# Altium PCB RobotCtrl_Power.PcbDoc
Units mil, origin at the board's own origin, x right, y up, seen from the top; angles counter-clockwise.
Board outline 3937.01 x 3937.01 mil, 4 copper layers (Top Layer, GND1, GND2, Bottom Layer), stack 23.756 mil thick; 51 components, 20 nets, 151 pads, 242 vias.
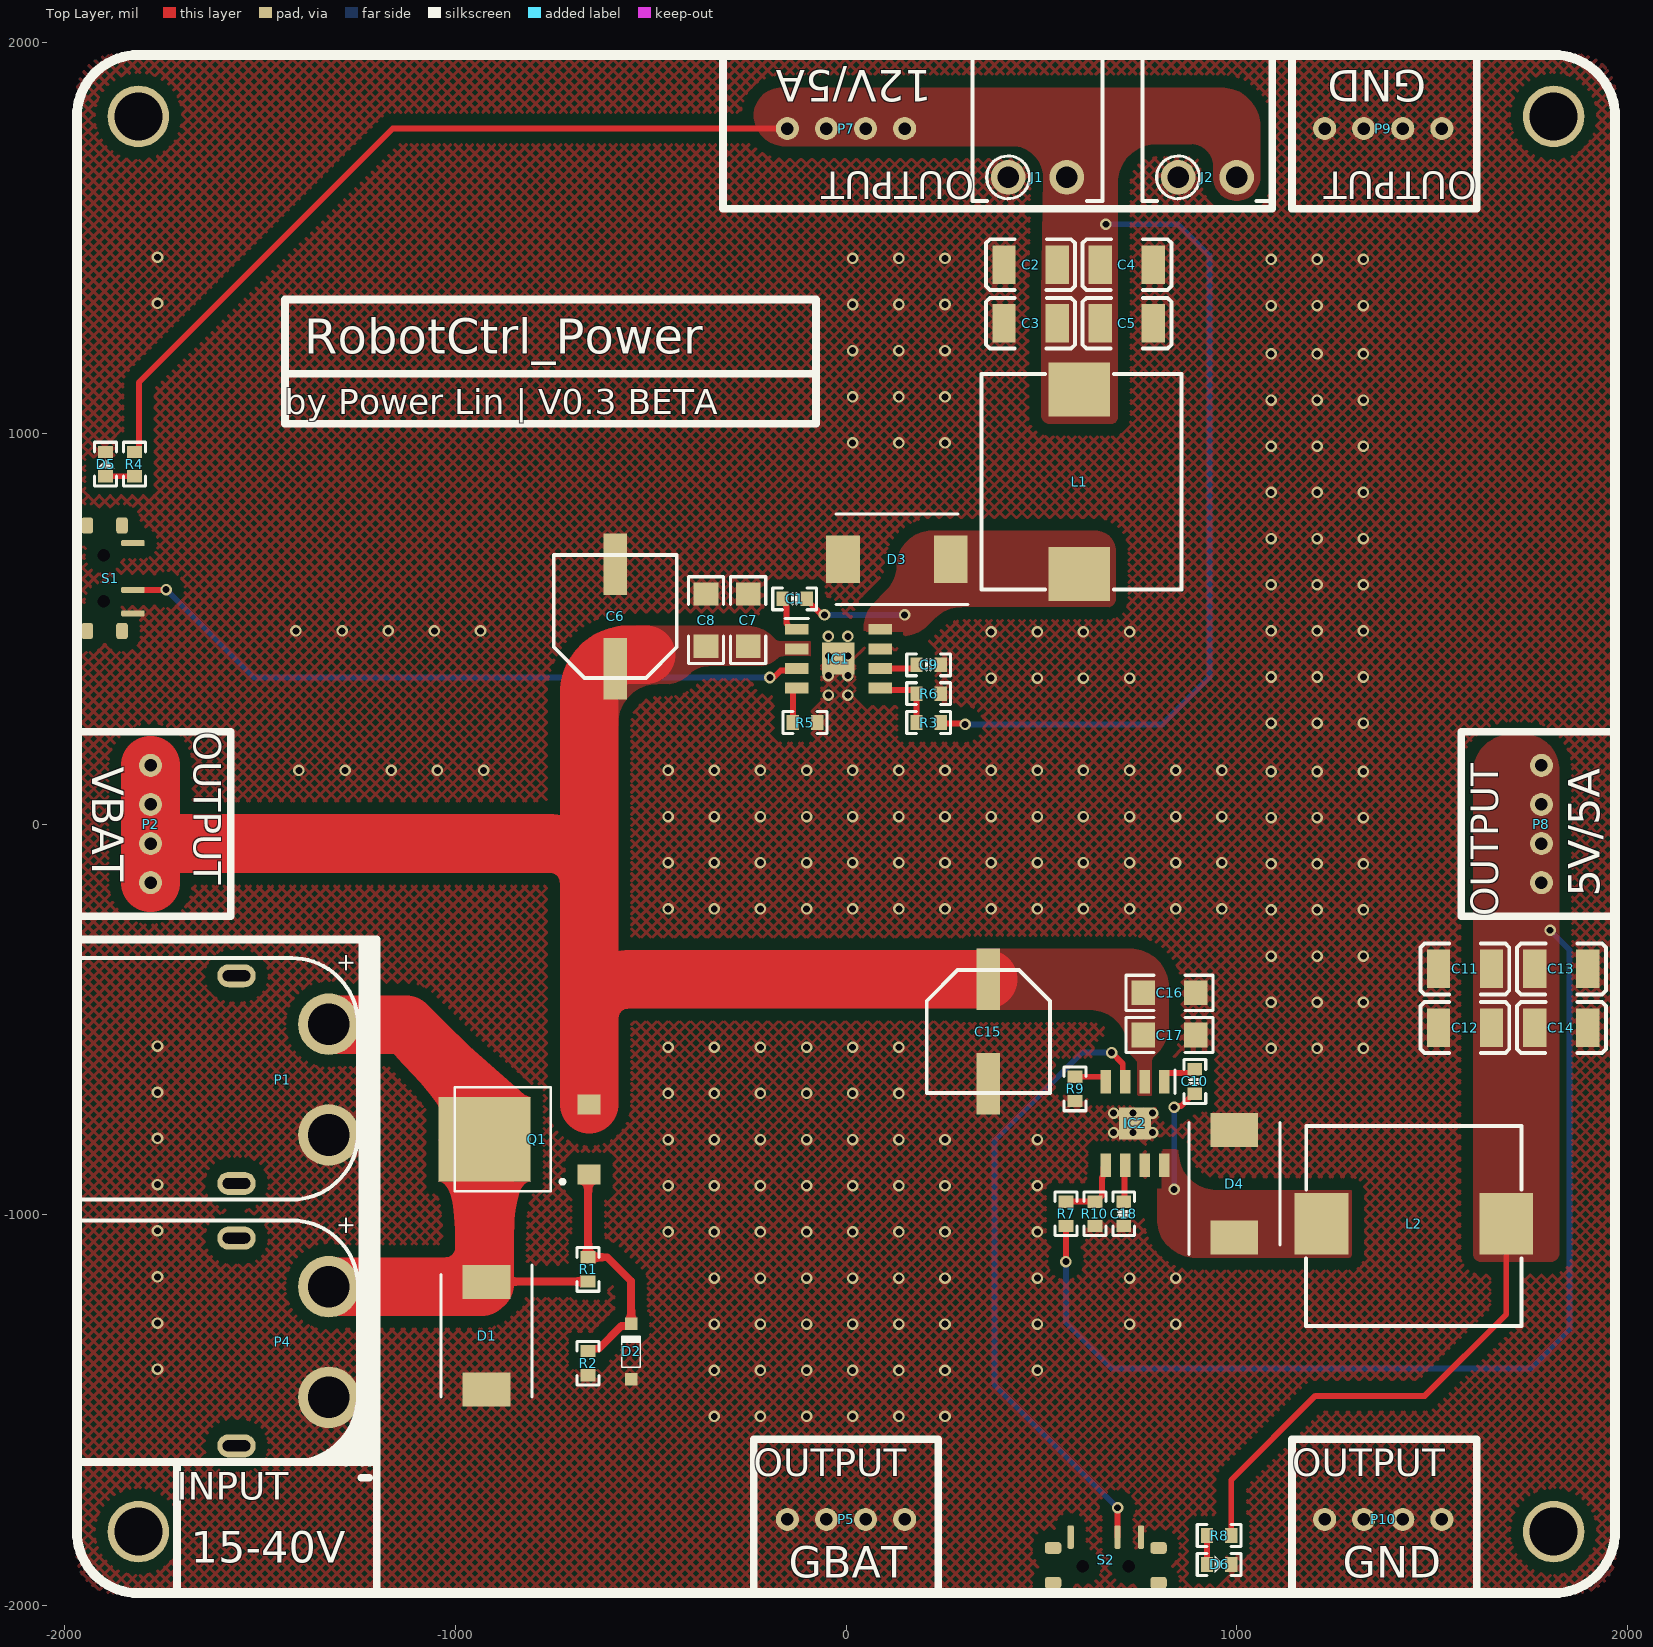
[diagram p0: Top Layer view]
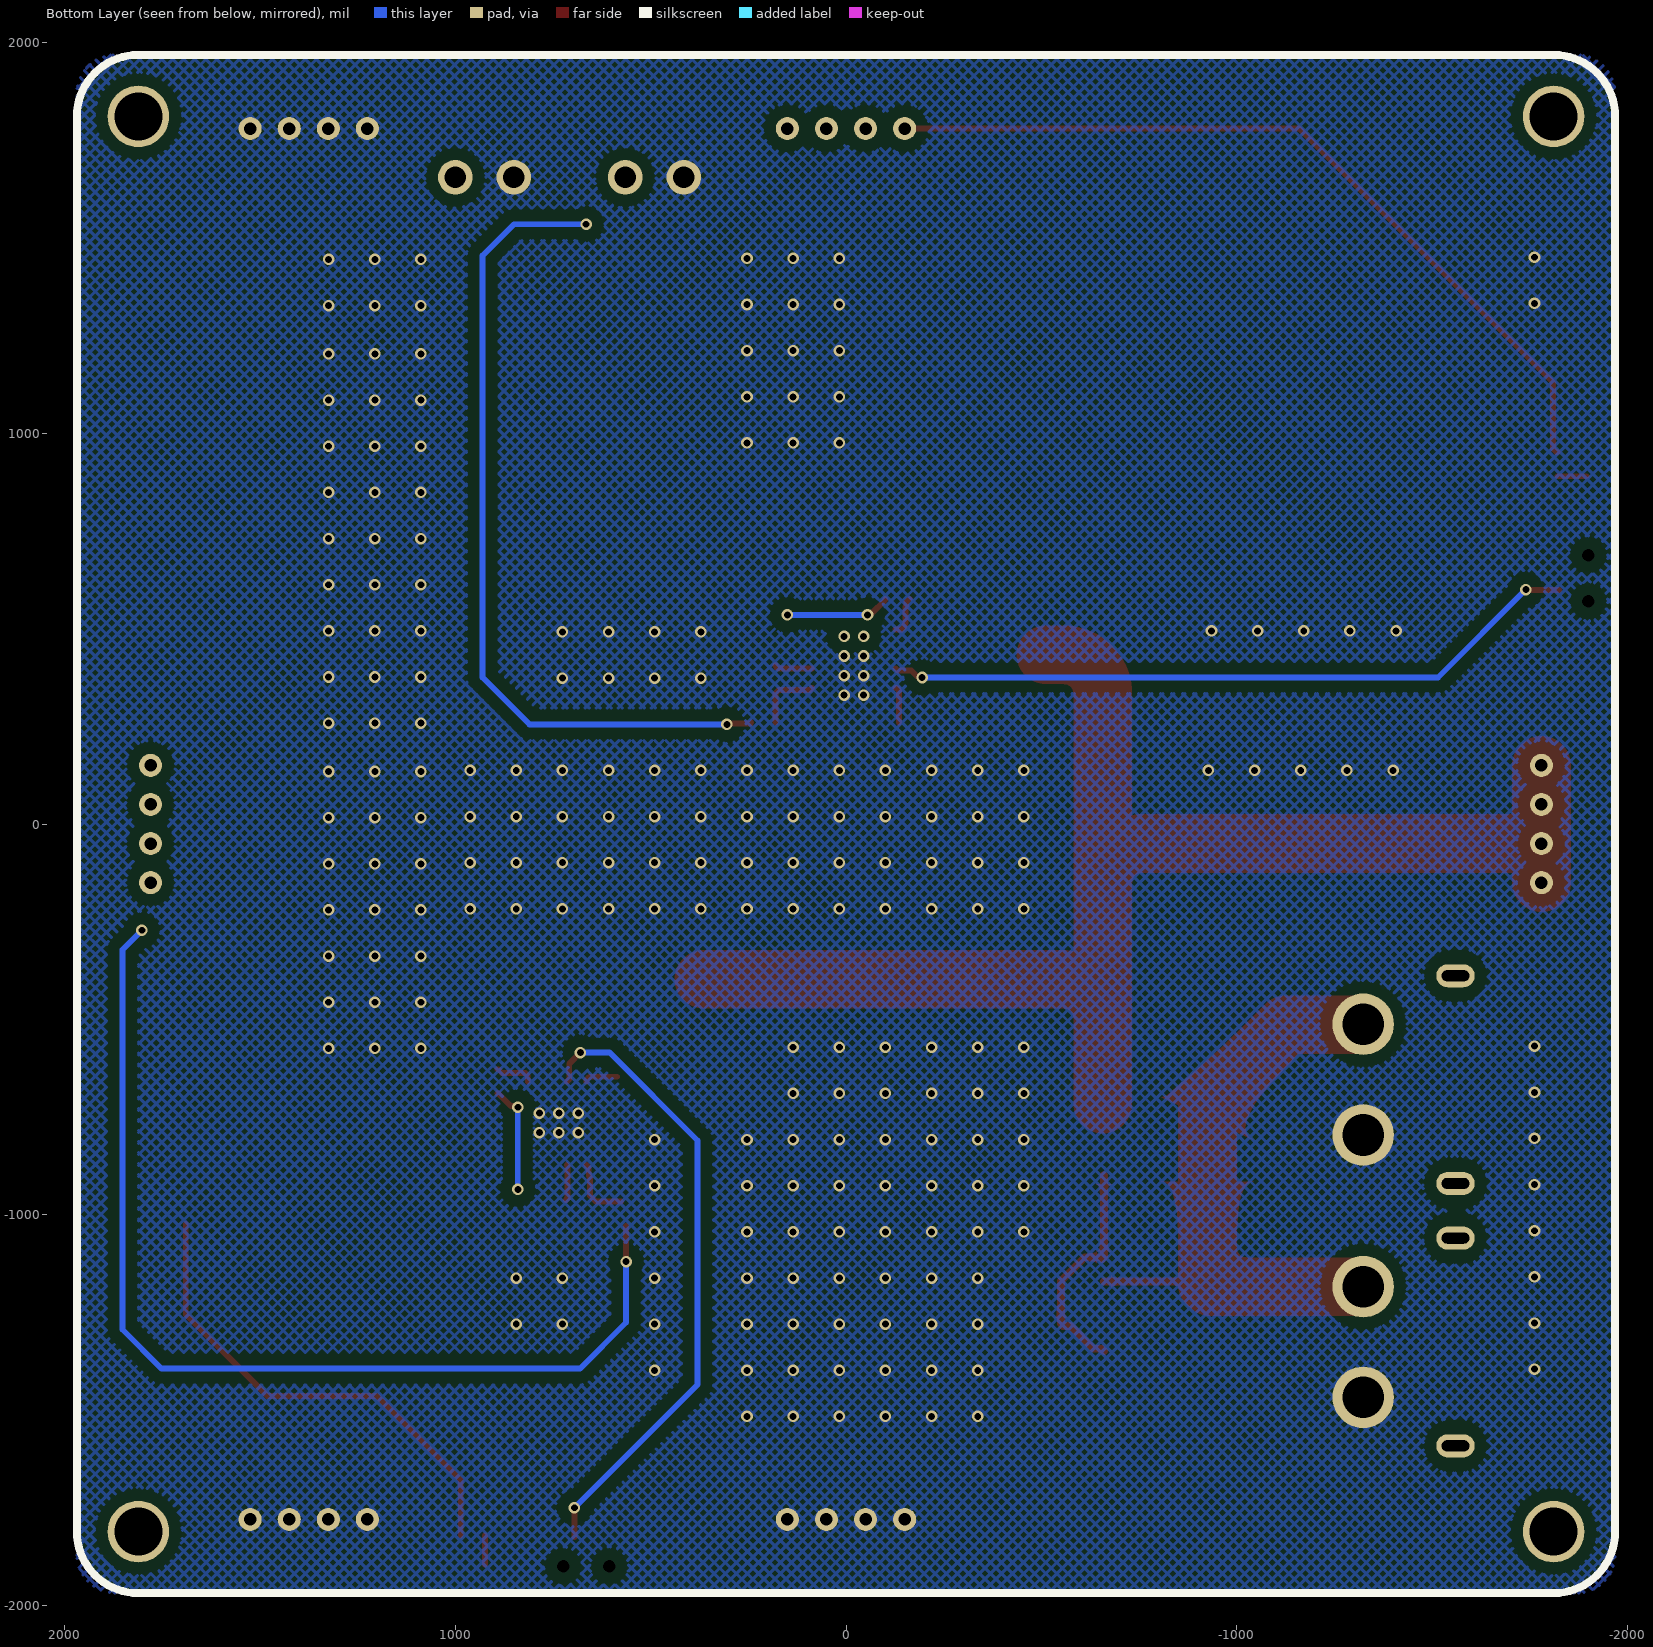
[diagram p1: Bottom Layer view, seen from below]
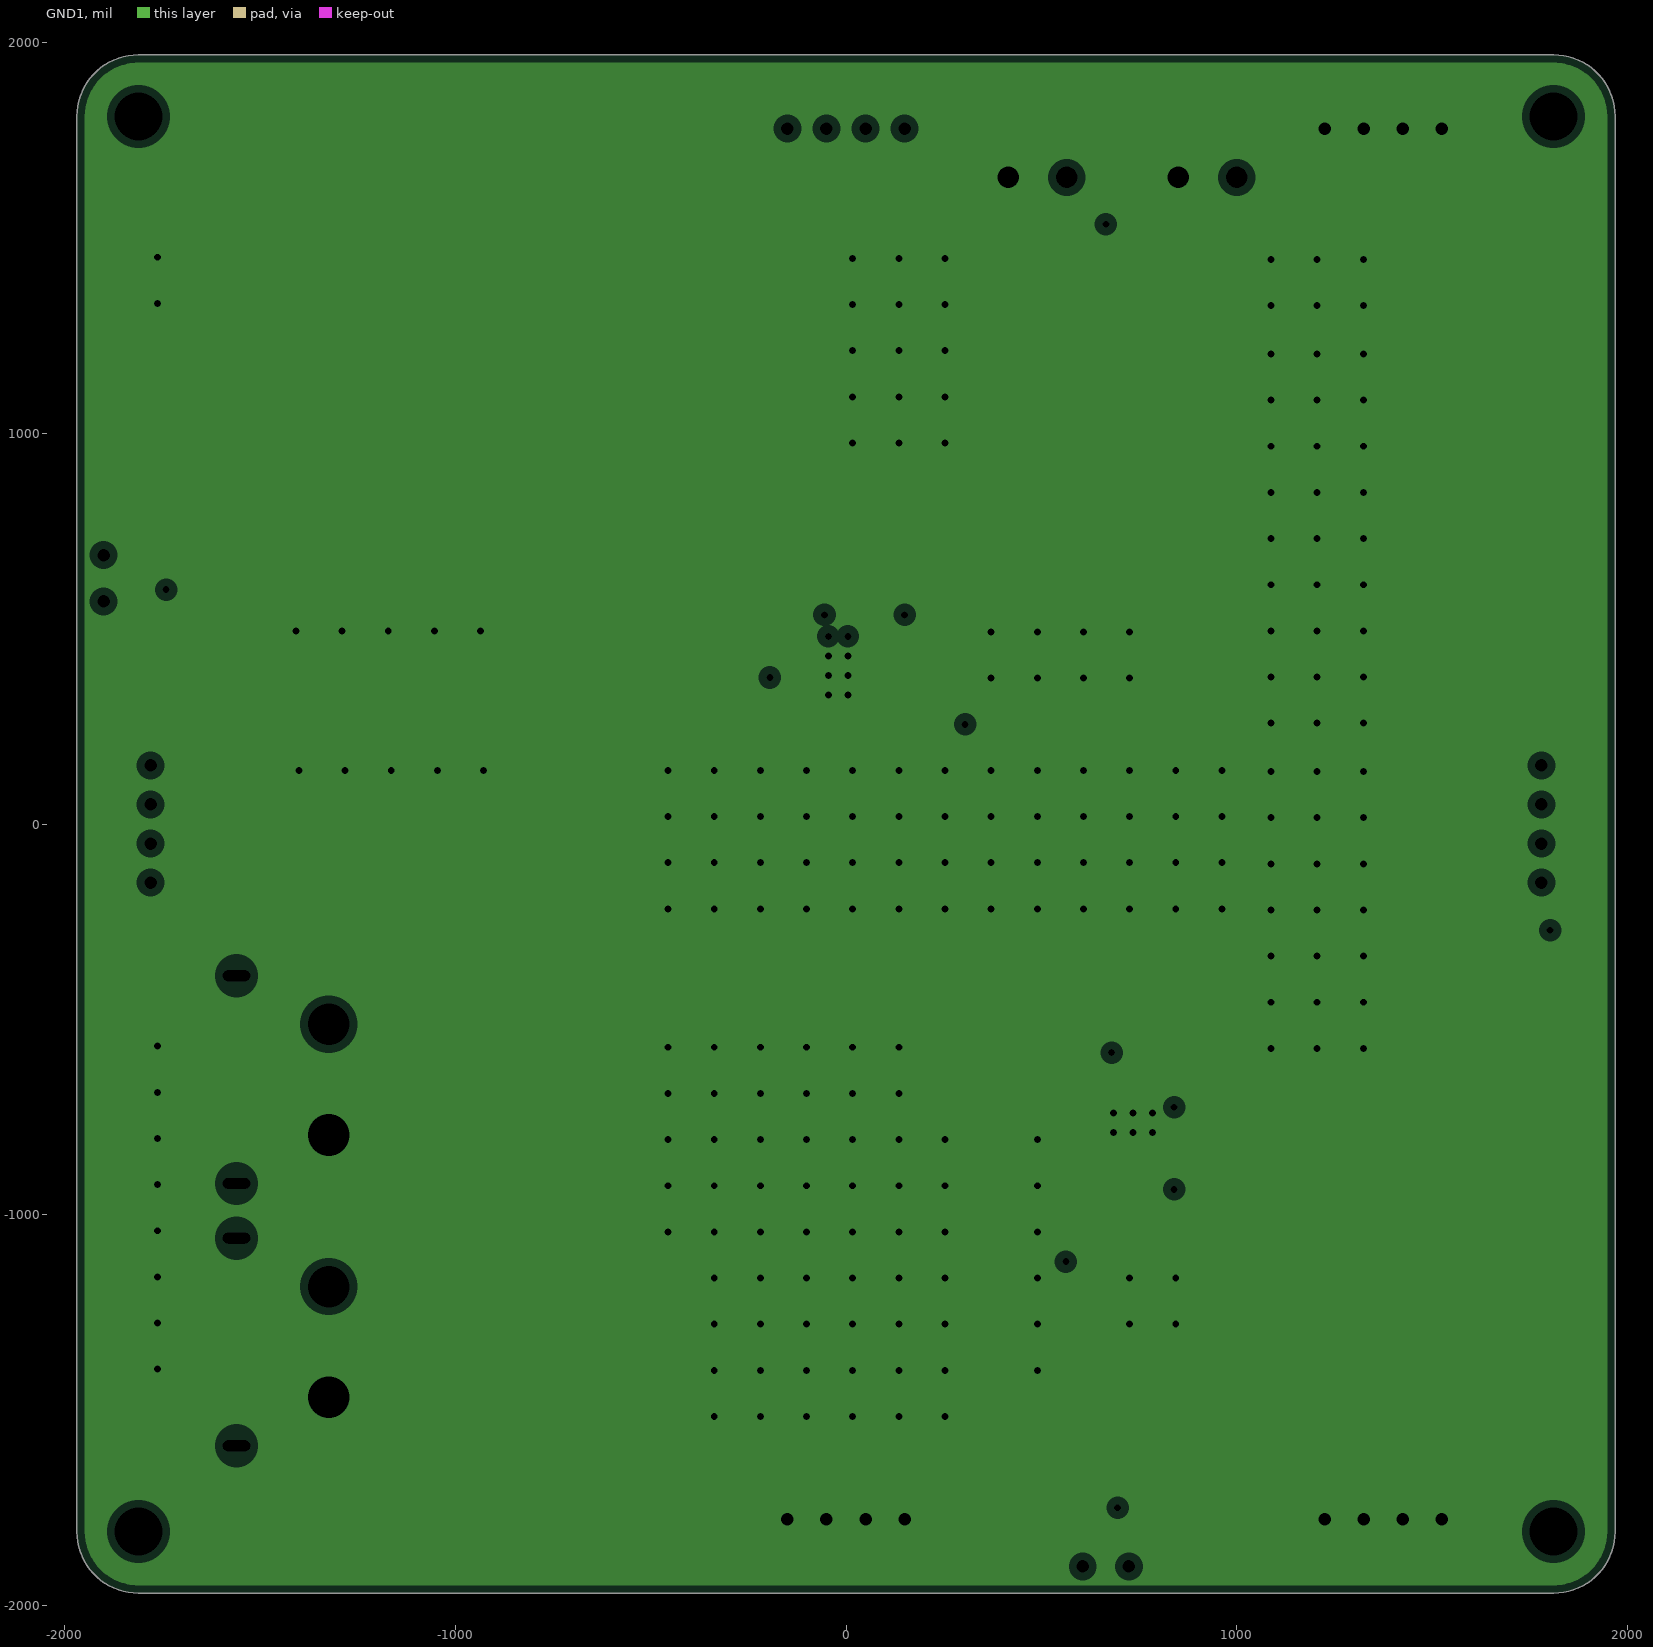
[diagram p2: GND1, clearances drawn from the general rule]
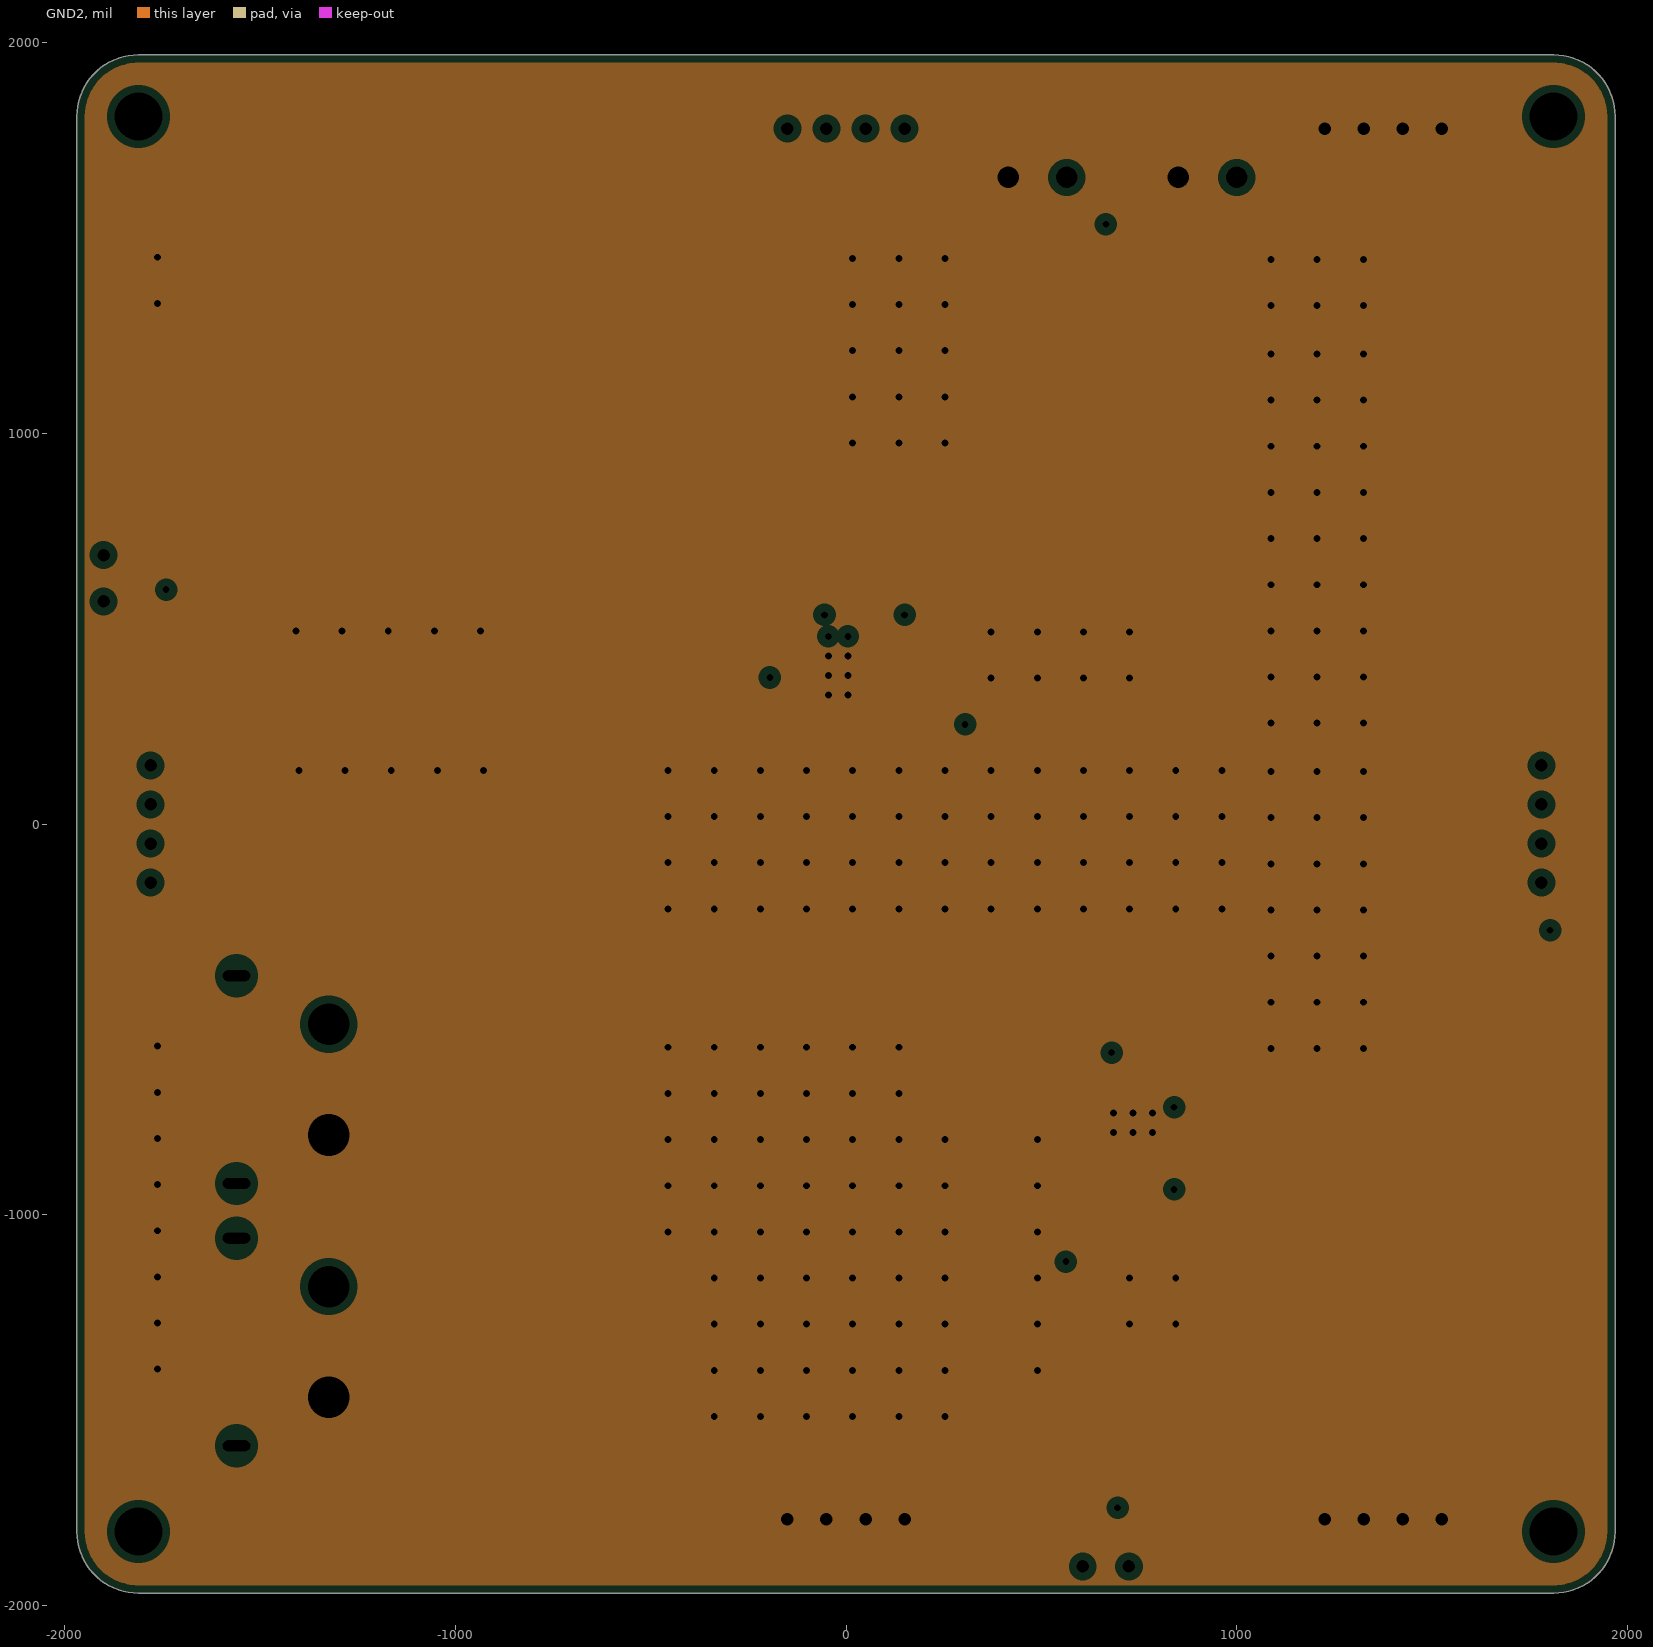
[diagram p3: GND2, clearances drawn from the general rule]

## Layer stack, top to bottom
Top Solder: solder mask 0.4, Solder Resist, Dk 3.5
Top Layer: signal copper 1.4
Dielectric 2: prepreg 2.8, PP-006, Dk 4.1
GND1: plane copper 1.378, net GND
Dielectric 1: dielectric 12.6, FR-4, Dk 4.8
GND2: plane copper 1.378, net GND
Dielectric 3: prepreg 2.8, PP-006, Dk 4.1
Bottom Layer: signal copper 1.4
Bottom Solder: solder mask 0.4, Solder Resist, Dk 3.5

## Board outline
-1968.5,-1811.02 -1968.5,1811.02 cw(c-1811.02,1811.02) -1811.02,1968.5 1811.02,1968.5 cw(c1811.02,1811.02) 1968.5,1811.02 1968.5,-1811.02 cw(c1811.02,-1811.02) 1811.02,-1968.5 -1811.02,-1968.5 cw(c-1811.02,-1811.02)

## Design rules (kind name [scope] priority, off if disabled: settings)
Clearance GND [InNet('GND')] p1: gap=10 ignorepadtopadclearanceinfootprint=FALSE except(0: Arc-Hole Track-Hole SMDPad-Hole THPad-Hole Via-Hole Fill-Hole Poly-Hole Region-Hole Text-Hole; 30: Arc-Fill Arc-Poly Arc-Region Track-Fill Track-Poly Track-Region SMDPad-Fill SMDPad-Poly SMDPad-Region THPad-Fill THPad-Poly THPad-Region Via-Fill Via-Poly Via-Region Fill-Fill Fill-Poly Fill-Region Poly-Poly Poly-Region Region-Region)
Clearance [All] p2: gap=10 ignorepadtopadclearanceinfootprint=FALSE except(0: Arc-Hole Track-Hole SMDPad-Hole THPad-Hole Via-Hole Fill-Hole Poly-Hole Region-Hole Text-Hole)
PlaneClearance [All] p1: clearance=20
PlaneConnect [All] p1: planeconnectstyle=Direct reliefexpansion=20 reliefentries=4 reliefconductorwidth=20 reliefairgap=10
PolygonConnect [All] p1: connectstyle=Direct reliefconductorwidth=30 reliefentries=4 polygonreliefangle="90 Angle" airgapwidth=10
RoutingVias [All] p1: holewidth=17.72 width=29.53 viastyle="Through Hole" minholewidth=17.72 minwidth=29.53 maxholewidth=17.72 maxwidth=29.53
SolderMaskExpansion [All] p1: expansion=4 istentingtop=FALSE
Width [All] p1: maxlimit=200 minlimit=10 preferedwidth=10
28 further rules are at their usual default settings.

## Components (designator, comment, footprint, x,y, rotation, side; value= is the part's Value field where it differs from the comment)
C1 "0.1uF/16V" CAP-0603 -131.43,576.4 r0 top
C2 "47uF/16V" CAP-1210 472.44,1431.71 r180 top
C3 "47uF/16V" CAP-1210 472.44,1281.7 r180 top
C4 "47uF/16V" CAP-1210 718.83,1431.71 r0 top
C5 "47uF/16V" CAP-1210 718.83,1281.7 r0 top
C6 "47uF/63V" C_SMD-8X10 -590.55,531.5 r180 top
C7 "2.2uF/100V" CAP-1206 -250.31,521.65 r270 top
C8 "2.2uF/100V" CAP-1206 -358.2,521.65 r270 top
C9 "22nF/16V" CAP-0603 211.42,407.48 r180 top
C10 "0.1uF/16V" CAP-0603 892.78,-658.97 r270 top
C11 "47uF/16V" CAP-1210 1584.32,-370.98 r180 top
C12 "47uF/16V" CAP-1210 1584.32,-520.99 r180 top
C13 "47uF/16V" CAP-1210 1830.71,-370.98 r0 top
C14 "47uF/16V" CAP-1210 1830.71,-520.99 r0 top
C15 "47uF/63V" C_SMD-8X10 364.17,-531.5 r0 top
C16 "2.2uF/100V" CAP-1206 828.19,-432.2 r180 top
C17 "2.2uF/100V" CAP-1206 828.19,-540.08 r180 top
C18 "22nF/16V" CAP-0603 710.86,-997.56 r90 top
D1 "TPSMCJ30CA" DO-214AB/SMC -920,-1310 r270 top
D2 "MMSZ5240B" SOD_123 -550,-1350 r270 top
D3 "20V 5A 550mV@5A" DO-214AB/SMC 130.45,677.73 r180 top
D4 "20V 5A 550mV@5A" DO-214AB/SMC 994.11,-920.84 r90 top
D5 "RED" LED-0603 -1895,921.1 r90 top
D6 "RED" LED-0603 955,-1895 r0 top
IC1 "LMR14050SDDAR" HSOIC-8 -19.69,423.23 r0 top
IC2 "LMR14050SDDAR" HSOIC-8 739.61,-766.46 r270 top
J1 "KF2EDGR-3.81-2P" "FCI 06-381-2PIN" 490,1655 r0 top
J2 "KF2EDGR-3.81-2P" "FCI 06-381-2PIN" 925,1655 r0 top
L1 "8.2uH@9.5A/13A" SMD-13.45x12.6x4.8mm 587.7,874.98 r90 top
L2 "8.2uH@9.5A/13A" SMD-13.45x12.6x4.8mm 1452.49,-1013.79 r0 top
P1 "XT60" XT60PW-M -1323.78,-795.98 r90 top
P2 "HDR1x4_2.54" HDR1x4_2.54_180 -1780,150 r0 top
P4 "XT60" XT60PW-M -1323.78,-1467.48 r90 top
P5 "HDR1x4_2.54" HDR1x4_2.54_180 -150,-1780 r90 top
P7 "HDR1x4_2.54" HDR1x4_2.54_180 -150,1780 r90 top
P8 "HDR1x4_2.54" HDR1x4_2.54_180 1780,150 r0 top
P9 "HDR1x4_2.54" HDR1x4_2.54_180 1225,1780 r90 top
P10 "HDR1x4_2.54" HDR1x4_2.54_180 1225,-1780 r90 top
Q1 "NCE40P70K" TO-252 -657.48,-897.24 r180 top
R1 "10k" R-0603 -660,-1140 r90 top
R2 "20k" R-0603 -660,-1380 r270 top
R3 "100k" R-0603 211.42,259.71 r0 top
R4 "10k" R-0603 -1821.12,921.1 r270 top
R5 "84.5k" R-0603 -105,259.71 r180 top
R6 "6.65k" R-0603 211.42,333.6 r180 top
R7 "100k" R-0603 563.09,-997.56 r270 top
R8 "10k" R-0603 955,-1821.12 r180 top
R9 "84.5k" R-0603 586.44,-677.88 r90 top
R10 "17.8k" R-0603 636.98,-997.56 r90 top
S1 "Switch_SPDT" SwitchSPDT_2.8X6.6_90 -1900,629.06 r270 top value="SPDT 3P"
S2 "Switch_SPDT" SwitchSPDT_2.8X6.6_90 665,-1900 r0 top value="SPDT 3P"

## Footprints (in the part's own frame and the unit in brackets; to place one, negate y for a bottom-side part, rotate by r counter-clockwise, add the part's x,y. Pads: shape width x height; smd on the part's side, far side on the other; paste and mask are expansions set on the pad)
C_SMD-8X10 [mm]
  rect 1.5x4 smd: 1(0,3.4) 2(0,-3.4)
  silkscreen extent -4,-4 4,4, body extent -4.15,-4.5 4.15,4.4, height 10
CAP-0603 [mm]
  rect 0.8x0.96 smd: 1(-0.79,0) 2(0.79,0)
  silkscreen extent -1.42,-0.71 1.42,0.71, body extent -0.76,-0.39 0.76,0.39, height 0.9
CAP-1206 [mm] "贴片元件"
  rect 1.524x1.6 smd: 1(-1.703,0) 2(1.7,0)
  silkscreen extent -2.83,-1.14 2.83,1.14, body extent -1.91,-0.89 1.91,0.89, height 1
CAP-1210 [mm] "贴片电容"
  rect 1.52x2.5 smd: 1(1.725,0) 2(-1.725,0)
  silkscreen extent -2.88,-1.65 2.9,1.65, body extent -1.68,-1.27 1.63,1.27, height 1
DO-214AB/SMC [mm]
  rect 2.2x3.1 smd: 1(3.5,0) 2(-3.5,0)
  silkscreen extent -4.6,-2.95 3.97,2.95, body extent -3.97,-2.95 3.97,2.95, height 2.5
"FCI 06-381-2PIN" [mm] "FCI Pluggable Terminal Block"
  round 2.25 hole 1.4: 1(-1.905,0) 2(1.905,0)
  silkscreen extent -4.22,-1.52 4.22,7.87, body extent -4.4,-1.4 4.4,7.8, height 7.6
HDR1x4_2.54_180 [mm]
  round 1.5 hole 0.813: 1(0,0) 2(0,-2.54) 3(0,-5.08) 4(0,-7.62)
  body extent -1.25,-8.89 1.25,1.27, height 8.2
HSOIC-8 [mm]
  rect 1.525x0.7 smd: 1(-2.712,1.905) 2(-2.712,0.635) 3(-2.712,-0.635) 4(-2.712,-1.905) 5(2.712,-1.905) 6(2.712,-0.635) 7(2.712,0.635) 8(2.712,1.905)
  rect 2.09x2.09 smd: 9(0,0)
  silkscreen extent -3.47,2.61 -1.95,2.61, body extent -3,-2.45 3,2.45, height 1.65
LED-0603 [mm]
  rect 0.8x0.96 smd: 1(-0.79,0) 2(0.79,0)
  silkscreen extent -1.42,-0.71 1.42,0.71, body extent -0.81,-0.4 0.81,0.4, height 0.6
R-0603 [mm]
  rect 0.8x0.96 smd: 1(-0.79,0) 2(0.79,0)
  silkscreen extent -1.42,-0.71 1.42,0.71, body extent -0.76,-0.38 0.76,0.38, height 0.41
SMD-13.45x12.6x4.8mm [mm]
  rect 3.5x4 smd: 1(-5.975,-0.25) 2(6.025,-0.25)
  silkscreen extent -6.98,-6.88 7.03,6.12, body extent -6.96,-6.88 7.01,6.08, height 5
SOD_123 [mm]
  rect 0.8x0.8 smd: 1(1.8,0) 2(-1.8,0)
  silkscreen extent -1.02,-0.6 1.02,0.6, body extent -1.95,-0.85 1.9,0.85, height 1.42
SwitchSPDT_2.8X6.6_90 [mil]
  rrect50% 42x30 smd: 0(-135,-42) 0(-135,47) 0(135,-42) 0(135,47)
  round 10 hole 31.5: 0(-59.06,0) 0(59.06,0)
  rrect50% 16x60 smd: 1(90,75) 2(30,75) 3(-90,75)
  body extent -152,-111 151,86, height 55
TO-252 [mm] "锟斤拷片MOS锟斤拷"
  rect 1.5x1.3 smd: 1(0,0) 2(0,-4.56)
  rect 6x5.5 smd: 3(6.8,-2.29)
  silkscreen extent 1.61,-5.66 8.74,1.09, body extent -0.56,-5.65 9.54,1.08, height 2.37
XT60PW-M [mm]
  oval 1.5x2.5 hole 0.7 slot 1.8 at 90 deg: 0(-3.15,6) 0(10.35,6)
  round 4 hole 2.7: 1(7.2,0) 2(0,0)
  silkscreen extent -4.2,-1.9 11.5,16.3, body extent -4.3,-1.95 11.6,16.35, height 8.45

## Part data
C1 C10: library part CAP, "CC0603KRX7R7BB104", Package=0402, SuppliersPartNumber=C52923, ComponentLink1Description=供应商链接, ComponentLink1URL=http://www.szlcsc.com/product/details_53938.html, Supplier=LC
C2 C3 C4 C5 C11 C12 C13 C14: library part CAP, "C1210X5R476K160NT", Package=0402, SuppliersPartNumber=C52923, ComponentLink1Description=供应商链接, ComponentLink1URL=http://www.szlcsc.com/product/details_53938.html, Supplier=LC
C6 C15: library part CAP-POL, "RVT1J470M0810", Package=3528, SuppliersPartNumber=C16133, ComponentLink1Description=供应商链接, ComponentLink1URL=http://www.szlcsc.com/product/details_16815.html, Supplier=LC
C7 C8 C16 C17: library part CAP, "CS3216X7R225K101NRI", Package=0402, SuppliersPartNumber=C52923, ComponentLink1Description=供应商链接, ComponentLink1URL=http://www.szlcsc.com/product/details_53938.html, Supplier=LC
C9 C18: library part CAP, "CC0603KRX7R7BB223", Package=0402, SuppliersPartNumber=C52923, ComponentLink1Description=供应商链接, ComponentLink1URL=http://www.szlcsc.com/product/details_53938.html, Supplier=LC
D1: library part TVS_C
D2: library part DIODE, "稳压 10V", Package=SMA(DO-214AC), SuppliersPartNumber=C22452, ComponentLink1Description=供应商链接, ComponentLink1URL=http://www.szlcsc.com/product/details_23178.html, Supplier=LC
D3 D4: library part DIODE_Schottky, "SS52"
D5 D6: library part LED, "发光二极管", Package=0603, SuppliersPartNumber=C2290, ComponentLink1Description=供应商链接, ComponentLink1URL=http://www.szlcsc.com/product/details_2663.html, Supplier=LC
IC1 IC2: Manufacturer_Name="Texas Instruments", Mouser Part Number=595-LMR14050SDDAR, Arrow Part Number=LMR14050SDDAR, Arrow Price/Stock=https://www.arrow.com/en/products/lmr14050sddar/texas-instruments?region=nac, Datasheet Link=http://www.ti.com/lit/gpn/lmr14050, Height=1.7mm, Manufacturer_Part_Number=LMR14050SDDAR, Mouser Price/Stock=https://www.mouser.co.uk/ProductDetail/Texas-Instruments/LMR14050SDDAR?qs=G5PZsBocSXuzvyUQdQ5q2Q%3D%3D
J1 J2: "TERM BLOCK HDR 2POS 90DEG 3.81MM", Color=Green, Current - UL=10A, Manufacturer="Amphenol Anytek", Manufacturer Part Number=OQ0232510000G, Operating Temperature="-40°C ~ 115°C", Voltage - UL=300V, Component Type=接线端子, ComponentLink1Description=Datasheet, ComponentLink1URL=http://portal.fciconnect.com/Comergent//fci/drawing/oqxx32x100j0g.pdf, Contact Mating Finish=Tin, Header Orientation="90°, Right Angle", LastUpdated="2019-12-16 19:14:30.110", Lifecycle Status=0, Minimum Order=1, Mounting Type="Through Hole", Number of Levels=1, Number of Positions=2, Packaging=Bulk, Part Number=OQ0232510000G, Part Status=Active, Pitch="0.150\" (3.81mm)", Positions Per Level=2, Price=0.49, Series=06-381, Termination Style=Solder, Type="Header, Male Pins, Shrouded (4 Side)"
L1 L2: library part INDUCTOR, "MDE1250-8R2M", Package=0402, SuppliersPartNumber=C32041, ComponentLink1Description=供应商链接, ComponentLink1URL=http://www.szlcsc.com/product/details_33003.html, Supplier=LC
P1 P4: library part XT30/60
P2 P5 P7 P8 P9 P10: "Header"
  P7 P8 P9 P10: System=Connector
Q1: library part P-MOS, Case/Package=SOT23-3, Manufacturer="NCE Power", Package Description="3-Pin Small Outline Transistor, Body 2.9 x 1.3 mm, Pitch 0.95 mm", Component Type=Transistors, Datasheet URL=http://www.ncepower.com/Upload/MOSFET/mos1/55vpmos/NCE3407Adatasheet-17275285683.pdf, Datasheet Version="Rev. 1.1, 07/2014", Mounting Technology=SM, Package Reference=SOT23-3, RoHS Compliant=Unknown
R1 R2 R4 R8: library part RES, "贴片电阻", Package=0805, SuppliersPartNumber=C17798, Supplier=LC
R3 R7: library part RES, "RC0603FR-07100KL", Package=0805, SuppliersPartNumber=C17798, Supplier=LC
R5 R9: library part RES, "RC0603FR-0784K5L", Package=0805, SuppliersPartNumber=C17798, Supplier=LC
R6: library part RES, "RC0603FR-076K65L", Package=0805, SuppliersPartNumber=C17798, Supplier=LC
R10: library part RES, "RC0603FR-0717K8L", Package=0805, SuppliersPartNumber=C17798, Supplier=LC
S1 S2: "TA-3524A-A1", Type=SPDT

## Free pads (board coordinates)
  round 157.48 hole 122.05: 2(-1811.02,-1811.02) 2(-1811.02,1811.02) 2(1811.02,-1811.02) 2(1811.02,1811.02)

## Via types
v1: diameter 29.53, hole 17.72, Top Layer to Bottom Layer, 242 vias

## Nets (pads, with @x,y where several pads share a name; then routed paths per layer and width w, separated by ;. In a path a pad name is that pad's centre, name@x,y a point inside that pad or via, vN(x,y) a via of type N, cw(c..) or ccw(c..) an arc to the next point about the centre after c; other vN are vias at no path point)
GND: C2.1 C3.1 C4.1 C5.1 C6.2 C7.1 C8.1 C9.1 C11.1 C12.1 C13.1 C14.1 C15.2 C16.1 C17.1 C18.1 D1.1 D2.1 D3.1 D4.1 D5.2 D6.2 IC1.7 IC1.9 IC2.7 IC2.9 J1.1 J2.1 P1.2 P4.2 P5.1 P5.2 P5.3 P5.4 P9.1 P9.2 P9.3 P9.4 P10.1 P10.2 P10.3 P10.4 R2.2 R5.1 R6.1 R9.1 R10.1 S1.1 S2.1
  other v1: -337.17,-1516.38 -219.06,-1516.38 -100.94,-1516.38 17.17,-1516.38 135.28,-1516.38 253.39,-1516.38 -337.17,-1398.27 -219.06,-1398.27 -100.94,-1398.27 17.17,-1398.27 135.28,-1398.27 253.39,-1398.27 489.61,-1398.27 -1762.2,-1395.43 -337.17,-1280.16 -219.06,-1280.16 -100.94,-1280.16 17.17,-1280.16 135.28,-1280.16 253.39,-1280.16 489.61,-1280.16 725.83,-1280.16 843.94,-1280.16 -1762.2,-1277.32 -337.17,-1162.05 -219.06,-1162.05 -100.94,-1162.05 17.17,-1162.05 135.28,-1162.05 253.39,-1162.05 489.61,-1162.05 725.83,-1162.05 843.94,-1162.05 -1762.2,-1159.21 -455.28,-1043.94 -337.17,-1043.94 -219.06,-1043.94 -100.94,-1043.94 17.17,-1043.94 135.28,-1043.94 253.39,-1043.94 489.61,-1043.94 -1762.2,-1041.1 -455.28,-925.83 -337.17,-925.83 -219.06,-925.83 -100.94,-925.83 17.17,-925.83 135.28,-925.83 253.39,-925.83 489.61,-925.83 -1762.2,-922.99 -455.28,-807.72 -337.17,-807.72 -219.06,-807.72 -100.94,-807.72 17.17,-807.72 135.28,-807.72 253.39,-807.72 489.61,-807.72 -1762.2,-804.88 685,-790 735,-790 785,-790 685,-740 735,-740 785,-740 -455.28,-689.61 -337.17,-689.61 -219.06,-689.61 -100.94,-689.61 17.17,-689.61 135.28,-689.61 -1762.2,-686.77 1087.87,-574.33 1205.98,-574.33 1324.09,-574.33 -455.28,-571.5 -337.17,-571.5 -219.06,-571.5 -100.94,-571.5 17.17,-571.5 135.28,-571.5 -1762.2,-568.66 1087.87,-456.22 1205.98,-456.22 1324.09,-456.22 1087.87,-338.11 1205.98,-338.11 1324.09,-338.11 1087.87,-220 1205.98,-220 1324.09,-220 -455.28,-217.17 -337.17,-217.17 -219.06,-217.17 -100.95,-217.17 17.17,-217.17 135.28,-217.17 253.39,-217.17 371.5,-217.17 489.61,-217.17 607.72,-217.17 725.83,-217.17 843.94,-217.17 962.05,-217.17 1087.87,-101.89 1205.98,-101.89 1324.09,-101.89 -455.28,-99.06 -337.17,-99.06 -219.06,-99.06 -100.95,-99.06 17.17,-99.06 135.28,-99.06 253.39,-99.06 371.5,-99.06 489.61,-99.06 607.72,-99.06 725.83,-99.06 843.94,-99.06 962.05,-99.06 1087.87,16.22 1205.98,16.22 1324.09,16.22 -455.28,19.06 -337.17,19.06 -219.06,19.06 -100.94,19.06 17.17,19.06 135.28,19.06 253.39,19.06 371.5,19.06 489.61,19.06 607.72,19.06 725.83,19.06 843.94,19.06 962.05,19.06 1087.87,134.33 1205.98,134.33 1324.09,134.33 -1400.16,137.17 -1282.05,137.17 -1163.94,137.17 -1045.83,137.17 -927.72,137.17 -455.28,137.17 -337.17,137.17 -219.06,137.17 -100.94,137.17 17.17,137.17 135.28,137.17 253.39,137.17 371.5,137.17 489.61,137.17 607.72,137.17 725.83,137.17 843.94,137.17 962.05,137.17 1087.87,258.11 1205.98,258.11 1324.09,258.11 -45,330 5,330 371.5,373.39 489.61,373.39 607.72,373.39 725.83,373.39 1087.87,376.22 1205.98,376.22 1324.09,376.22 -45,380 5,380 -45,430 5,430 371.5,491.5 489.61,491.5 607.72,491.5 725.83,491.5 -1407.87,494.33 -1289.76,494.33 -1171.65,494.33 -1053.54,494.33 -935.43,494.33 1087.87,494.33 1205.98,494.33 1324.09,494.33 1087.87,612.44 1205.98,612.44 1324.09,612.44 1087.87,730.55 1205.98,730.55 1324.09,730.55 1087.87,848.66 1205.98,848.66 1324.09,848.66 1087.87,966.77 1205.98,966.77 1324.09,966.77 17.16,975.28 135.28,975.28 253.39,975.28 1087.87,1084.88 1205.98,1084.88 1324.09,1084.88 17.17,1093.39 135.28,1093.39 253.39,1093.39 1087.87,1202.99 1205.98,1202.99 1324.09,1202.99 17.17,1211.5 135.28,1211.5 253.39,1211.5 1087.87,1326.77 1205.98,1326.77 1324.09,1326.77 17.17,1329.61 135.28,1329.61 253.39,1329.61 -1762.2,1332.44 1087.87,1444.88 1205.98,1444.88 1324.09,1444.88 17.17,1447.72 135.28,1447.72 253.39,1447.72 -1762.2,1450.55
NetC1_1: C1.1 IC1.1 | length 102.6
  Top Layer w15: C1.1 -154.28,568.15 -154.28,558.49 -152,556.21 -152,513.29 -148.98,510.27 -148.98,504.51 -142.7,498.23 IC1.1
NetC1_2: C1.2 D3.2 IC1.8 L1.1 | length 269.3
  Top Layer w15: C1.2 -100.33,573.25 -64.86,537.78 -57.78,537.78 v1(-55,535)
  Bottom Layer w15: v1(-55,535) v1(150,535)
NetC9_2: C9.2 IC1.6 | length 98.5
  Top Layer w15: IC1.6 171.06,398.23 ccw(c171.06,407.48) C9.2
NetC10_1: C10.1 IC2.1 | length 100.9
  Top Layer w15: IC2.1 814.61,-643.45 820.89,-637.17 880.32,-637.17 889.63,-627.86 C10.1
NetC10_2: C10.2 D4.2 IC2.8 L2.1 | length 277.2
  Top Layer w15: v1(840,-725) 842.78,-722.22 857.48,-722.22 889.63,-690.07 C10.2
  Bottom Layer w15: v1(840,-935) v1(840,-725)
NetC18_2: C18.2 IC2.6 | length 97.3
  Top Layer w15: C18.2@714.61,-957.21 ccw(c723.86,-957.21) 716.32,-962.57 712.73,-958.99 712.73,-875.11 IC2.6
NetD1_2: D1.2 P1.1 P4.1 Q1.3 R1.1 | length 1835.2
  Top Layer w20: D1.2@-925.2,-1177.4 D1.2 -918.9,-1171.1 R1.1
  Top Layer w150: P4.1 -1025.2,-1184.02 ; P1.1 -1322.35,-513.95 -1126.05,-513.95 -925.2,-714.8 Q1.3 -925.2,-1084.02 ; -925.2,-1020 -925.2,-1084.02 ; -1025.2,-1184.02 ccw(c-1025.2,-1084.02) -925.2,-1084.02 ; -1025.2,-1184.02 -931.81,-1184.02 -925.2,-1177.4 -925.2,-1084.02
NetD2_2: D2.2 Q1.1 R1.2 R2.1 | length 601.8
  Top Layer w15: Q1.1@-660,-899.76 Q1.1
  Top Layer w20: R2.1 -654.25,-1343.15 -633.15,-1343.15 -574.88,-1284.88 -555.75,-1284.88 D2.2 -550,-1170 -611.1,-1108.9 R1.2 ; Q1.1@-660,-899.76 R1.2 ; R1.2@-655.91,-1112.98 R1.2
NetD5_A: D5.1 R4.2 | length 73.9
  Top Layer w15: D5.1 R4.2
NetD6_A: D6.1 R8.2 | length 73.9
  Top Layer w15: D6.1 R8.2
NetIC1_3: IC1.3 S1.2 | length 1800.4
  Top Layer w15: S1.2 v1@-1740.94,599.06 ; v1(-195,375) -192.22,377.78 -182.22,377.78 -166.92,393.08 -131.61,393.08 IC1.3
  Bottom Layer w15: v1(-1740,600) -1515,375 v1(-195,375)
NetIC1_4: IC1.4 R5.2 | length 94
  Top Layer w15: R5.2 -136.1,338.58 cw(c-126.46,338.58) IC1.4
NetIC1_5: IC1.5 R3.1 R6.2 | length 173.9
  Top Layer w15: IC1.5 92.24,343.07 172.07,343.07 180.32,334.82 R6.2 R3.1
NetIC2_3: IC2.3 S2.2 | length 1627.7
  Top Layer w15: v1(680,-585) 708.33,-613.33 708.33,-653.41 IC2.3 ; S2.2 v1(695,-1750)
  Bottom Layer w15: v1(680,-585) 605,-585 380,-810 380,-1435 v1(695,-1750)
NetIC2_4: IC2.4 R9.2 | length 85.5
  Top Layer w15: R9.2 651.69,-646.78 cw(c651.69,-659.69) IC2.4
NetIC2_5: IC2.5 R7.1 R10.2 | length 170.6
  Top Layer w15: R7.1@576.09,-966.46 R10.2@640.13,-966.46 ; R10.2 R10.2@640.13,-966.46 ; IC2.5 658.33,-879.51 658.33,-901.21 655,-904.54 655,-951.59 R10.2@640.13,-966.46
VBAT: C6.1 C7.2 C8.2 C15.1 C16.2 C17.2 IC1.2 IC2.2 P2.1 P2.2 P2.3 P2.4 Q1.2 | length 3811.9
  Top Layer w150: P2.4 P2.3 ; P2.1 P2.2 P2.3 ; Q1.2 -657.48,-497.64 ; -511.81,433.07 -557.48,433.07 ccw(c-557.48,333.07) -657.48,333.07 -657.48,-150 ; C15.1 -557.48,-397.64 ccw(c-557.48,-497.64) -657.48,-497.64 ; P2.3 -757.48,-50 cw(c-757.48,-150) -657.48,-150 ; -657.48,-497.64 -657.48,-150
VCC_5V: C11.2 C12.2 C13.2 C14.2 L2.2 P8.1 P8.2 P8.3 P8.4 R7.2 R8.1 | length 3920.3
  Top Layer w15: v1@563.05,-1117.95 R7.2 R7.2 ; R8.1 986.1,-1678.9 1201.38,-1463.62 1481.38,-1463.62 1689.71,-1255.29 L2.2
  Bottom Layer w15: v1(563,-1120) 563,-1276 681,-1394 1752,-1394 1852,-1294 1852,-322 v1(1802,-272)
VCC_12V: C2.2 C3.2 C4.2 C5.2 J1.2 J2.2 L1.2 P7.1 P7.2 P7.3 P7.4 R3.2 R4.1 | length 4230.8
  Top Layer w15: R4.1 -1817.97,952.2 -1809.72,960.45 -1809.72,1130.28 -1160,1780 P7.1 ; R3.2 244.88,257.36 302.64,257.36 v1(305,255)
  Bottom Layer w15: v1(305,255) 810,255 930,375 930,1455 850,1535 v1(665,1535)
pads on no net: P1.0 P4.0 S1.0 S1.3 S2.0 S2.3
copper on no net:
  other v1: -45,480 5,480

## Polygon pours and split planes (outlines as drawn)
VCC_5V on Top Layer "NONET_L01_P-001" (solid, pour order 5): 1825,140 ccw(c1735,140) 1735,230 1705,230 ccw(c1705,130) 1605,130 1605,-1100 ccw(c1625,-1100) 1625,-1120 1805,-1120 ccw(c1805,-1100) 1825,-1100
GND on Top Layer "NONET_L01_P-001" (hatched 45Degree grid 20 track 8, pour order 15): 1868.5,1968.5 cw(c1868.5,1868.5) 1968.5,1868.5 1968.5,-1868.5 cw(c1868.5,-1868.5) 1868.5,-1968.5 -1868.5,-1968.5 cw(c-1868.5,-1868.5) -1968.5,-1868.5 -1968.5,1868.5 cw(c-1868.5,1868.5) -1868.5,1968.5
VCC_12V on Top Layer "NONET_L01_P-001" (solid, pour order 9): -235.69,1814.03 cw(c-164.72,1814.03) -164.72,1885 -140,1885 960,1885 cw(c960,1785) 1060,1785 1060,1655 cw(c1000,1655) 1000,1595 cw(c1000,1655) 940,1655 940,1685 ccw(c885,1685) 885,1740 795,1740 ccw(c795,1640) 695,1640 695,1040 cw(c680,1040) 680,1025 520,1025 cw(c520,1045) 500,1045 500,1355 505,1655 ccw(c425,1655) 425,1735 -156.99,1735 cw(c-156.83,1813.87)
NetC10_2 on Top Layer "NONET_L01_P-001" (solid, pour order 12): 796,-840 796,-838 796,-1010 ccw(c896,-1010) 896,-1110 1287,-1110 ccw(c1287,-1102) 1295,-1102 1295,-941 ccw(c1291,-941) 1291,-937 948,-937 cw(c948,-840) 851,-840 ccw(c843,-840) 843,-832 803,-832 ccw(c803,-839) 796,-839
NetC1_2 on Top Layer "NONET_L01_P-001" (solid, pour order 10): 690,700 ccw(c640,700) 640,750 600,749.99 ccw(c598.56,647.98) 598.58,750 220,750 ccw(c220,660) 130,660 cw(c45.5,660) 105.25,600.25 73.28,568.28 ccw(c141.57,500) 45,500 45,492.07 ccw(c62.07,492.07) 50,480 138.58,480 ccw(c138.58,580) 209.29,509.29 225.71,525.71 cw(c296.42,455) 296.42,555 670,555 ccw(c670,575) 690,575
VBAT on Top Layer "NONET_L01_P-001" (solid, pour order 7): 336,-319 726,-319 cw(c726,-419) 826,-419 826,-515.58 cw(c726,-515.58) 796.71,-586.29 789,-594 ccw(c803.49,-608.49) 783,-608.49 783,-693 cw(c781,-693) 781,-695 748,-695 cw(c748,-693) 746,-693 746,-615.07 ccw(c728.93,-615.07) 741,-603 728.78,-590.78 cw(c747.56,-572) 721,-572 ccw(c625,-572) 625,-476 336,-476
VBAT on Top Layer "NONET_L01_P-001" (solid, pour order 6): -145,468 -166.79,468 cw(c-166.79,491.5) -183.41,474.88 -187.24,478.71 ccw(c-257.95,408) -257.95,508 -263.01,508 -530,508 ccw(c-530,483.86) -547.07,500.93 -641,407 -641,352.42 ccw(c-541,352.42) -611.71,281.71 -583,253 -583,258 cw(c-483,258) -483,358 -459.94,358 ccw(c-459.94,439.94) -402,382 -399.09,384.91 cw(c-353,338.82) -353,404 -230,404 -221.51,404 ccw(c-221.51,465.46) -178.06,422 cw(c-161.16,405.1) -161.16,429 -93.41,429 ccw(c-93.41,432.41) -91,430 ccw(c-93.41,432.41) -90,432.41 -90,464.59 ccw(c-93.41,464.59) -91,467 ccw(c-93.41,464.59) -93.41,468
GND on Bottom Layer "NONET_L01_P-001" (hatched 45Degree grid 20 track 8, pour order 16): 1868.5,1968.5 cw(c1868.5,1868.5) 1968.5,1868.5 1968.5,-1868.5 cw(c1868.5,-1868.5) 1868.5,-1968.5 -1868.5,-1968.5 cw(c-1868.5,-1868.5) -1968.5,-1868.5 -1968.5,1868.5 cw(c-1868.5,1868.5) -1868.5,1968.5
GND on GND2 (split plane): 1820.83,1948.14 1830.59,1947.09 1840.24,1945.35 1849.75,1942.92 1859.06,1939.82 1868.13,1936.07 1876.91,1931.68 1885.34,1926.67 1893.41,1921.07 1901.05,1914.91 1908.23,1908.23 1914.91,1901.05 1921.07,1893.41 1926.67,1885.34 1931.68,1876.91 1936.07,1868.13 1939.82,1859.06 1942.92,1849.75 1945.35,1840.24 1947.09,1830.59 1948.14,1820.83 1948.47,1811.65 1948.41,1811.02 1948.41,-1811.02 1948.47,-1811.65 1948.14,-1820.83 1947.09,-1830.59 1945.35,-1840.24 1942.92,-1849.75 1939.82,-1859.06 1936.07,-1868.13 1931.68,-1876.91 1926.67,-1885.34 1921.07,-1893.41 1914.91,-1901.05 1908.23,-1908.23 1901.05,-1914.91 1893.41,-1921.07 1885.34,-1926.67 1876.91,-1931.68 1868.13,-1936.07 1859.06,-1939.82 1849.75,-1942.92 1840.24,-1945.35 1830.59,-1947.09 1820.83,-1948.14 1811.65,-1948.47 1811.02,-1948.41 -1811.02,-1948.41 -1811.65,-1948.47 -1820.83,-1948.14 -1830.59,-1947.09 -1840.24,-1945.35 -1849.75,-1942.92 -1859.06,-1939.82 -1868.13,-1936.07 -1876.9,-1931.68 -1885.34,-1926.67 -1893.4,-1921.07 -1901.05,-1914.91 -1908.23,-1908.23 -1914.91,-1901.05 -1921.07,-1893.41 -1926.67,-1885.34 -1931.68,-1876.91 -1936.07,-1868.13 -1939.82,-1859.06 -1942.92,-1849.75 -1945.35,-1840.24 -1947.09,-1830.59 -1948.14,-1820.83 -1948.47,-1811.65 -1948.41,-1811.02 -1948.41,1811.02 -1948.47,1811.65 -1948.14,1820.83 -1947.09,1830.59 -1945.35,1840.24 -1942.92,1849.75 -1939.82,1859.06 -1936.07,1868.13 -1931.68,1876.91 -1926.67,1885.34 -1921.07,1893.41 -1914.91,1901.05 -1908.23,1908.23 -1901.05,1914.91 -1893.4,1921.07 -1885.34,1926.67 -1876.9,1931.68 -1868.13,1936.07 -1859.06,1939.82 -1849.75,1942.92 -1840.24,1945.35 -1830.59,1947.09 -1820.83,1948.14 -1811.65,1948.47 -1811.02,1948.41 1811.02,1948.41 1811.65,1948.47
GND on GND1 (split plane): 1820.83,1948.14 1830.59,1947.09 1840.24,1945.35 1849.75,1942.92 1859.06,1939.82 1868.13,1936.07 1876.91,1931.68 1885.34,1926.67 1893.41,1921.07 1901.05,1914.91 1908.23,1908.23 1914.91,1901.05 1921.07,1893.41 1926.67,1885.34 1931.68,1876.91 1936.07,1868.13 1939.82,1859.06 1942.92,1849.75 1945.35,1840.24 1947.09,1830.59 1948.14,1820.83 1948.47,1811.65 1948.41,1811.02 1948.41,-1811.02 1948.47,-1811.65 1948.14,-1820.83 1947.09,-1830.59 1945.35,-1840.24 1942.92,-1849.75 1939.82,-1859.06 1936.07,-1868.13 1931.68,-1876.91 1926.67,-1885.34 1921.07,-1893.41 1914.91,-1901.05 1908.23,-1908.23 1901.05,-1914.91 1893.41,-1921.07 1885.34,-1926.67 1876.91,-1931.68 1868.13,-1936.07 1859.06,-1939.82 1849.75,-1942.92 1840.24,-1945.35 1830.59,-1947.09 1820.83,-1948.14 1811.65,-1948.47 1811.02,-1948.41 -1811.02,-1948.41 -1811.65,-1948.47 -1820.83,-1948.14 -1830.59,-1947.09 -1840.24,-1945.35 -1849.75,-1942.92 -1859.06,-1939.82 -1868.13,-1936.07 -1876.9,-1931.68 -1885.34,-1926.67 -1893.4,-1921.07 -1901.05,-1914.91 -1908.23,-1908.23 -1914.91,-1901.05 -1921.07,-1893.41 -1926.67,-1885.34 -1931.68,-1876.91 -1936.07,-1868.13 -1939.82,-1859.06 -1942.92,-1849.75 -1945.35,-1840.24 -1947.09,-1830.59 -1948.14,-1820.83 -1948.47,-1811.65 -1948.41,-1811.02 -1948.41,1811.02 -1948.47,1811.65 -1948.14,1820.83 -1947.09,1830.59 -1945.35,1840.24 -1942.92,1849.75 -1939.82,1859.06 -1936.07,1868.13 -1931.68,1876.91 -1926.67,1885.34 -1921.07,1893.41 -1914.91,1901.05 -1908.23,1908.23 -1901.05,1914.91 -1893.4,1921.07 -1885.34,1926.67 -1876.9,1931.68 -1868.13,1936.07 -1859.06,1939.82 -1849.75,1942.92 -1840.24,1945.35 -1830.59,1947.09 -1820.83,1948.14 -1811.65,1948.47 -1811.02,1948.41 1811.02,1948.41 1811.65,1948.47

## Silkscreen, mask and mechanical layers (free items; w line width, h text height)
Top Overlay:
  lines w20: -1968.5,-275.59 -1968.5,-295.28 -1200.79,-295.28 -1200.79,-1968.5 ; -1968.5,-236.22 -1574.8,-236.22 -1574.8,236.22 -1968.5,236.22 ; -1692.91,-1968.5 -1712.6,-1968.5 -1712.6,-1632.83 -1965.51,-1632.83 -1200.79,-1632.83 ; -1348.43,-1624.02 -1300,-1624.02 ccw(c-1300,-1574.02) -1250,-1574.02 -1250,-1515.75 ; -1279.53,-1633.86 ccw(c-1279.53,-1594.49) -1240.16,-1594.49 -1240.16,-1456.69 ; -1279.53,-1574.8 cw(c-1299.21,-1574.8) -1299.21,-1594.49 ccw(c-1299.21,-1564.96) -1269.68,-1564.96 ; -1269.68,-1555.12 -1269.68,-1564.96 ; -1250,-1525.59 -1250,-1564.17 cw(c-1300,-1564.17) -1300,-1614.17 -1328.74,-1614.17 -1309.84,-1614.17 ccw(c-1309.84,-1564.17) -1259.84,-1564.17 -1259.84,-1545.28 -1259.84,-1555.12 cw(c-1309.06,-1555.12) -1309.06,-1604.33 ccw(c-1309.06,-1564.96) -1269.68,-1564.96 ; -1240.16,-1673.23 -1220.47,-1673.23 ; -1238,-1633.86 -1238,-295.28 ; -1219.47,-1633.86 -1219.47,-295.28 ; -314.96,1968.5 -314.96,1874.96 -314.96,1574.96 -314.8,1574.8 1091.08,1574.8 1091.08,1965 ; -236.22,-1968.5 -236.22,-1574.8 236.22,-1574.8 236.22,-1968.5 ; -77.01,1152.52 -1435.51,1152.52 ; 1141.73,-1968.5 1141.73,-1574.8 1614.17,-1574.8 1614.17,-1968.5 ; 1141.73,1968.5 1141.73,1574.8 1614.17,1574.8 1614.17,1968.5 ; 1968.5,-236.22 1574.8,-236.22 1574.8,236.22 1968.5,236.22 ; -1435.51,1152.52 -1435.51,1024.57 -76.77,1024.57 -76.77,1152.52 -76.77,1342.52 -1435.51,1342.52 -1435.51,1152.52
  lines w25: -1968.5,-1811.02 ccw(c-1811.02,-1811.02) -1811.02,-1968.5 1811.02,-1968.5 ccw(c1811.02,-1811.02) 1968.5,-1811.02 1968.5,1811.02 ccw(c1811.02,1811.02) 1811.02,1968.5 -1811.02,1968.5 ccw(c-1811.02,1811.02) -1968.5,1811.02 -1968.5,-1811.02
  text "12V/5A" at 219.93,1929.75 h80 r180
  text "GND" at 1484.58,1929.75 h80 r180
  text "OUTPUT" at 328,1692.91 h120 r180
  text "OUTPUT" at 1614.17,1692.91 h120 r180
  text "RobotCtrl_Power" at -1386.06,1203.61 h90
  text "by Power Lin | V0.3 BETA" at -1436.88,1027.52 h110
  text "OUTPUT" at -1692.91,236.22 h120 r270
  text "VBAT" at -1929.75,146.62 h80 r270
  text "5V/5A" at 1929.75,-186.61 h80 r90
  text "OUTPUT" at 1692.91,-236.22 h120 r90
  text "OUTPUT" at -236.22,-1692.91 h120
  text "OUTPUT" at 1141.73,-1692.91 h120
  text "INPUT" at -1712.6,-1751.97 h120
  text "15-40V" at -1676.62,-1890.38 h80
  text "GBAT" at -146.62,-1929.75 h80
  text "GND" at 1271.32,-1929.75 h80
Bottom Overlay:
  the board outline again, w20
Mechanical 1:
  the board outline again, w10

## Text inside footprints (layer, text, board x,y; h text height)
P1: Top Overlay "+" at -1245.04,-382.6 h78.74 r90
P4: Top Overlay "+" at -1245.04,-1054.09 h78.74 r90